# Altium PCB PCB_Altium_OpenComs_APSM1_2023-05-12.pcbdoc
Units mm, origin at the board's own origin, x right, y up, seen from the top; angles counter-clockwise.
Board outline 104.88 x 79.6 mm, 2 copper layers (Top Layer, Bottom Layer); 27 components, 6 nets, 26 pads, 2 vias.
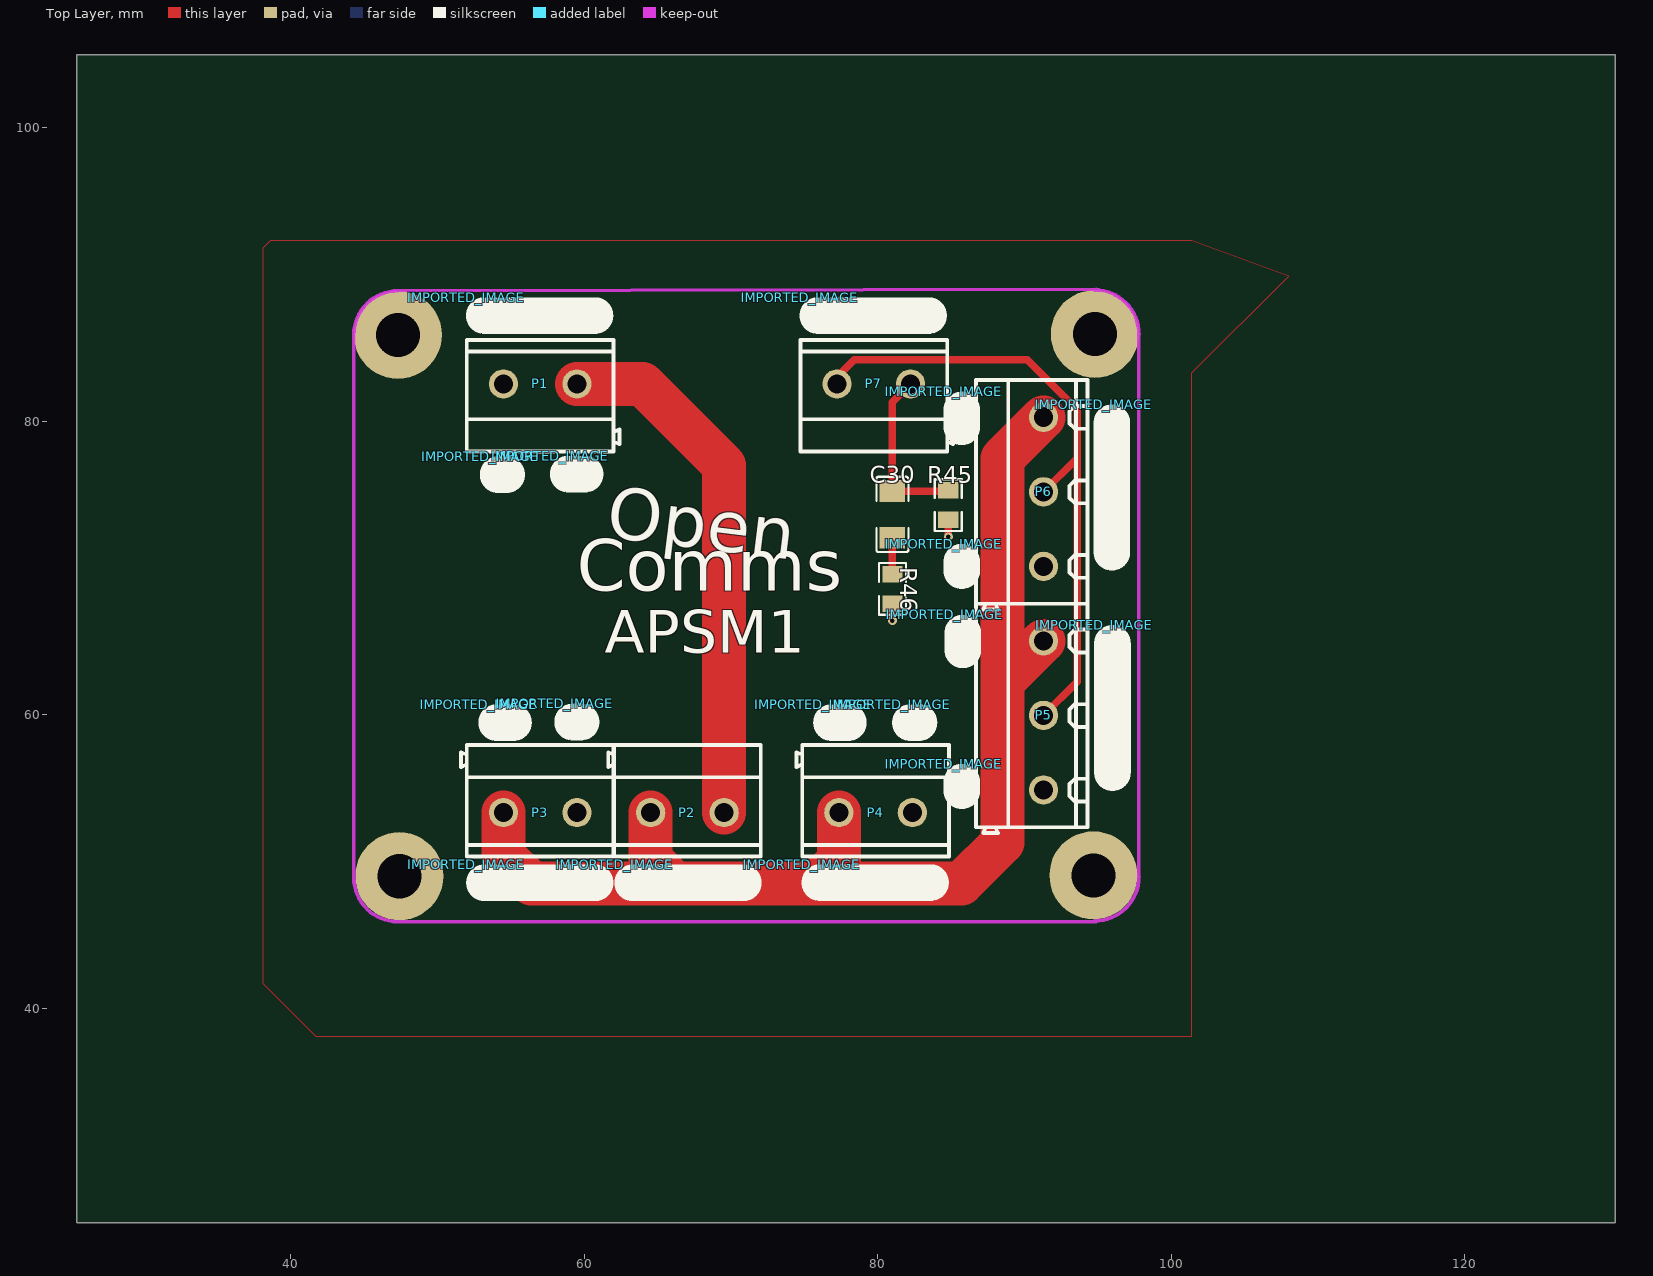
[diagram p0: Top Layer view]
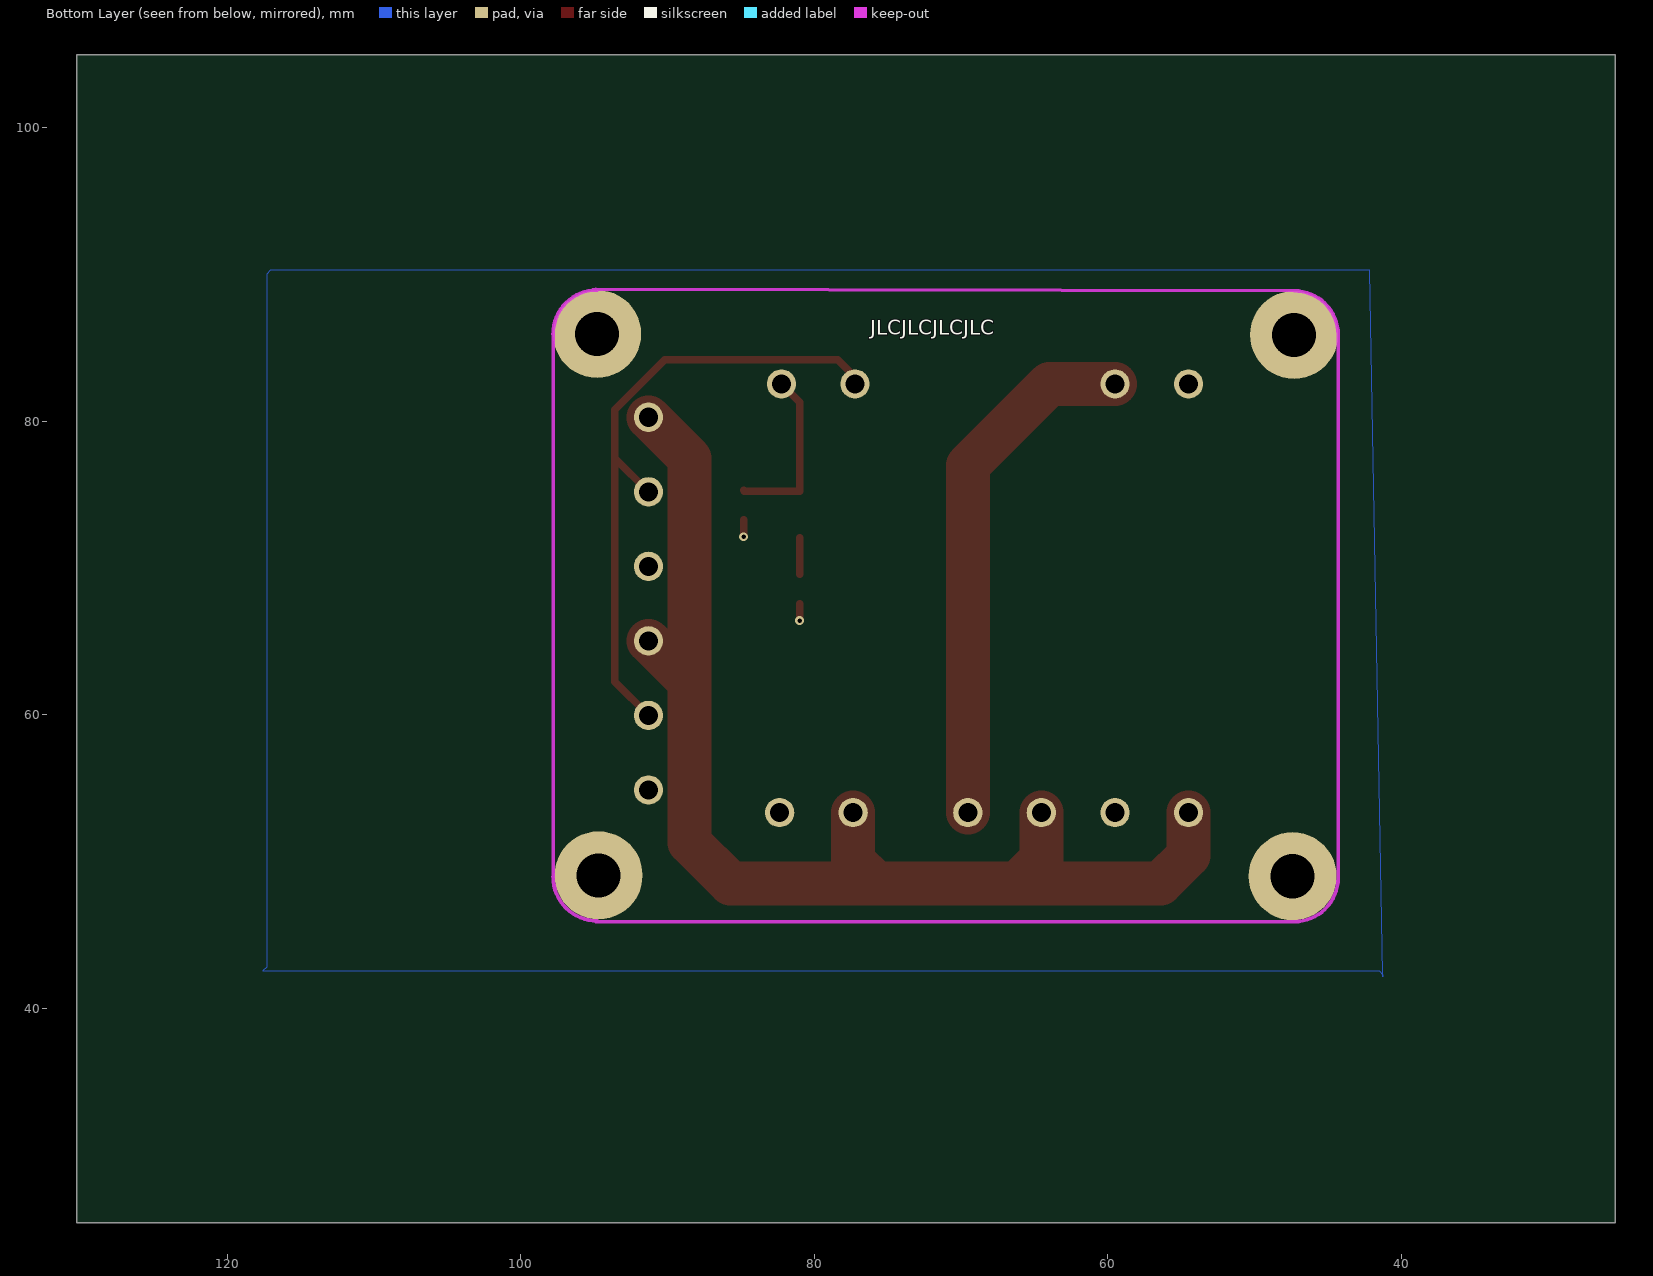
[diagram p1: Bottom Layer view, seen from below]

## Layer stack, top to bottom
Top Layer: signal copper (thickness not stored)
Dielectric: dielectric 0.32, FR-4, Dk 4.8
Bottom Layer: signal copper (thickness not stored)

## Board outline
130.279,25.4 25.4,25.4 25.4,105 130.279,105

## Components (designator, comment, footprint, x,y, rotation, side; value= is the part's Value field where it differs from the comment)
C30 "10u" C1206 81.003,73.66 r90 top
IMPORTED_IMAGE "IMPORTED_IMAGE" IMPORTED_IMAGE 51.959,88.441 r0 top
IMPORTED_IMAGE "IMPORTED_IMAGE" IMPORTED_IMAGE 62.07,49.784 r0 top
IMPORTED_IMAGE "IMPORTED_IMAGE" IMPORTED_IMAGE 51.97,49.784 r0 top
IMPORTED_IMAGE "IMPORTED_IMAGE" IMPORTED_IMAGE 74.827,49.8 r0 top
IMPORTED_IMAGE "IMPORTED_IMAGE" IMPORTED_IMAGE 74.692,88.441 r0 top
IMPORTED_IMAGE "IMPORTED_IMAGE" IMPORTED_IMAGE 94.768,66.105 r0 top
IMPORTED_IMAGE "IMPORTED_IMAGE" IMPORTED_IMAGE 94.729,81.13 r0 top
IMPORTED_IMAGE "IMPORTED_IMAGE" IMPORTED_IMAGE 57.681,77.639 r0 top
IMPORTED_IMAGE "IMPORTED_IMAGE" IMPORTED_IMAGE 52.8,60.7 r0 top
IMPORTED_IMAGE "IMPORTED_IMAGE" IMPORTED_IMAGE 75.623,60.7 r0 top
IMPORTED_IMAGE "IMPORTED_IMAGE" IMPORTED_IMAGE 84.569,66.804 r0 top
IMPORTED_IMAGE "IMPORTED_IMAGE" IMPORTED_IMAGE 84.5,82.008 r0 top
IMPORTED_IMAGE "IMPORTED_IMAGE" IMPORTED_IMAGE 57.974,60.739 r0 top
IMPORTED_IMAGE "IMPORTED_IMAGE" IMPORTED_IMAGE 81,60.7 r0 top
IMPORTED_IMAGE "IMPORTED_IMAGE" IMPORTED_IMAGE 52.9,77.6 r0 top
IMPORTED_IMAGE "IMPORTED_IMAGE" IMPORTED_IMAGE 84.5,56.642 r0 top
IMPORTED_IMAGE "IMPORTED_IMAGE" IMPORTED_IMAGE 84.5,71.642 r0 top
P1 "24V_IN" CONN-TH_2P-P5.00 57,82.55 r180 top
P2 "POWER_SWITCH" CONN-TH_2P-P5.00 67.033,53.34 r0 top
P3 "24V_LED" CONN-TH_2P-P5.00 57,53.34 r0 top
P4 "24V" CONN-TH_2P-P5.00 79.86,53.34 r0 top
P5 "PL1" CONN-TH_3P-P5.00 91.3,59.96 r90 top
P6 "PL2" CONN-TH_3P-P5.00 91.3,75.2 r90 top
P7 "TERMINATE_SWITCH" CONN-TH_2P-P5.00 79.733,82.55 r180 top
R45 "2.2k" R0805 84.813,74.295 r90 top
R46 "200" R0805 81.003,68.58 r270 top

## Footprints (in the part's own frame and the unit in brackets; to place one, negate y for a bottom-side part, rotate by r counter-clockwise, add the part's x,y. Pads: shape width x height; smd on the part's side, far side on the other; paste and mask are expansions set on the pad)
C1206 [mm]
  rect 1.485x1.728 smd: 1(-1.593,0) 2(1.593,0)
  silkscreen extent -2.56,-1.09 2.56,1.09
CONN-TH_2P-P5.00 [mm]
  round 2 hole 1.3: 1(-2.504,0) 2(2.504,0)
  silkscreen extent -5.4,-3 5,4.6
CONN-TH_3P-P5.00 [mm]
  round 2 hole 1.3: 1(-5.08,0) 2(0,0) 3(5.08,0)
  silkscreen extent -8.02,-3 7.62,4.6
IMPORTED_IMAGE [mm]
  silkscreen extent 0,-2.46 10,0
R0805 [mm]
  rect 1.133x1.377 smd: 1(-1,0) 2(1,0)
  silkscreen extent -1.76,-0.92 1.76,0.92

## Free pads (board coordinates)
  round 6 hole 3: 1(47.3,85.9) 1(47.4,49) 1(94.7,49.06) 1(94.8,85.96)

## Via types
v1: diameter 0.61, hole 0.305, Top Layer to Bottom Layer, tented both sides, 2 vias

## Nets (pads, with @x,y where several pads share a name; then routed paths per layer and width w, separated by ;. In a path a pad name is that pad's centre, name@x,y a point inside that pad or via, vN(x,y) a via of type N, cw(c..) or ccw(c..) an arc to the next point about the centre after c; other vN are vias at no path point)
+24V: P2.1 P3.1 P4.1 P5.3 P6.3 | length 89.2
  Top Layer w3: P3.1 54.496,50.419 56.401,48.514 66.144,48.514 ; P2.1 64.529,50.129 66.144,48.514 ; 72.53,48.514 85.715,48.514 88.501,51.3 88.501,77.481 P6.3 ; P4.1 77.356,50.056 75.814,48.514 66.144,48.514 ; 88.501,60.204 88.501,62.241 P5.3
+24V_UNSWITCHED: P1.1 P2.2 | length 36
  Top Layer w3: P1.1 63.985,82.55 69.537,76.997 P2.2
BUS: P5.2 P6.2 P7.2 | length 45
  Top Layer w0.512: P7.2 77.229,83.027 78.399,84.201 90.2,84.201 93.599,80.8 93.599,62.258 P5.2 ; P6.2 93.599,77.499 93.599,78.679
BUS_TERM: C30.2 P7.1 R45.2 | length 11.6
  Top Layer w0.512: P7.1 81.003,81.315 C30.2 84.77,75.253 R45.2
C30_1: C30.1 R46.1 | length 2.5
  Top Layer w0.512: R46.1 C30.1
GND: P1.2 P3.2 P4.2 P5.1 P6.1 R45.1 R46.2 | length 2.3
  Top Layer w0.512: v1(81.003,66.421) R46.2 ; v1(84.813,72.136) R45.1

## Polygon pours and split planes (outlines as drawn)
GND on Top Layer (solid): 101.4,92.3 38.6,92.3 38.1,91.8 38.1,41.7 41.7,38.1 101.4,38.1 101.4,83.3 108,89.9
GND on Bottom Layer (solid): 41.254,42.293 41.252,42.164 41.252,42.291 41.254,42.293
GND on Bottom Layer (solid): 41.254,42.293 42.141,90.297 117.071,90.297 117.325,90.043 117.325,42.799 117.579,42.545 41.506,42.545 41.254,42.293

## Keep-outs
Keep-Out Layer:
  lines w0.254: 44.3,48.9 ccw(c47.3,48.9) 47.3,45.9 ; 44.3,85.9 cw(c47.3,85.9) 47.3,88.9 ; 94.8,45.96 ccw(c94.8,48.96) 97.8,48.96 ; 94.8,88.96 cw(c94.8,85.96) 97.8,85.96

## Silkscreen, mask and mechanical layers (free items; w line width, h text height)
Top Overlay:
  text "Open" at 61.267,70.978 h6 r353
  text "Comms" at 59.489,67.295 h6
  text "APSM1" at 61.385,63.288 h5
Bottom Overlay:
  text "JLCJLCJLCJLC" at 76.2,85.9 h1
Document:
  lines w0.003: 77.839,65.2 77.84,65.2